# EAGLE board LSU 4.9 OpenAFR Gauge 48mm (EAGLE 9.6.2)
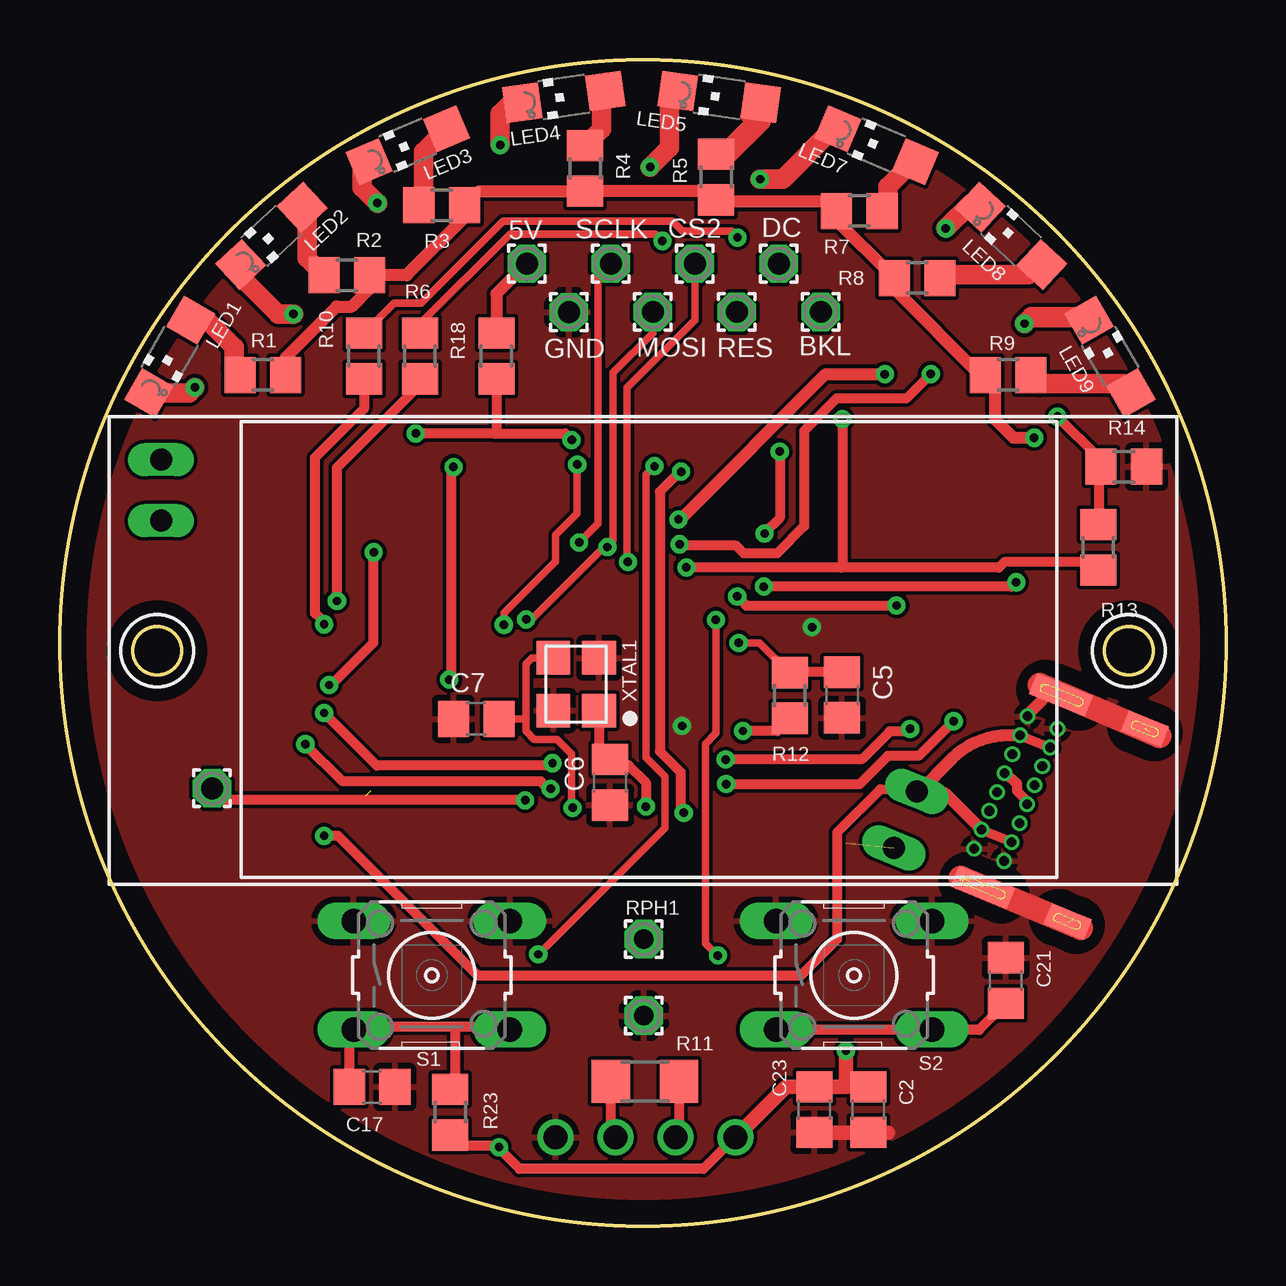
[diagram p0: board, top side]
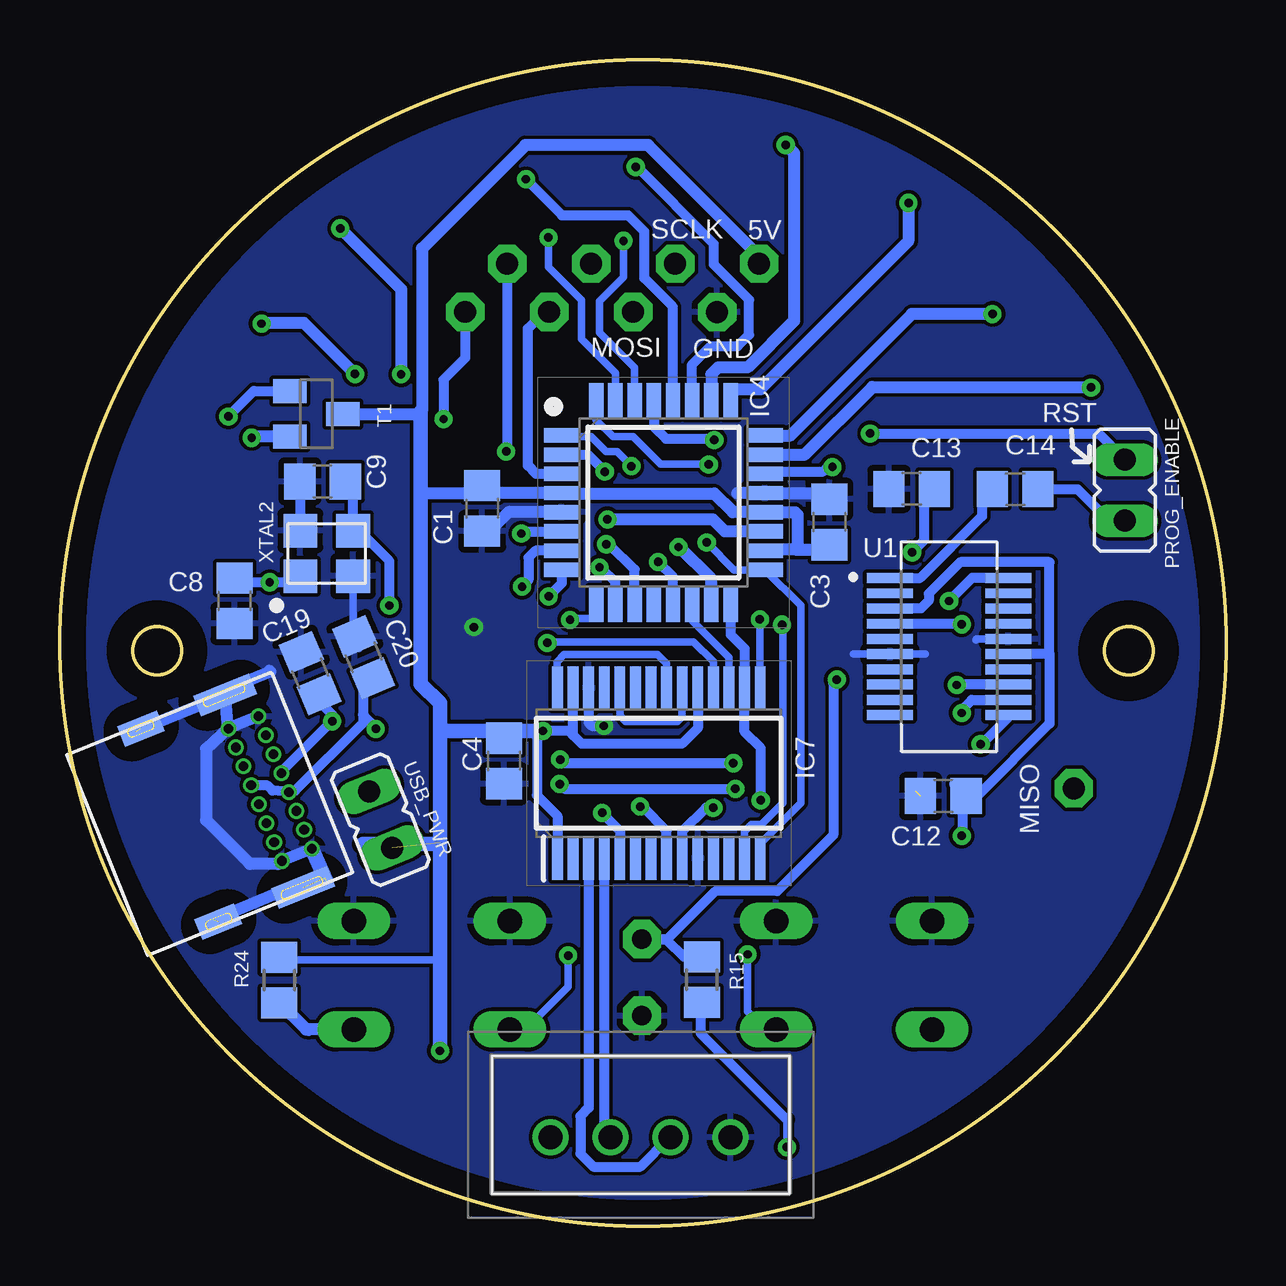
[diagram p1: board, bottom side, seen from below]

Size 48.6 x 48.6 mm. Coordinates in mm from the lower left corner, seen from the top.
Outline: circle at 4.05,23.98 radius 1
Outline: circle at 44.55,23.98 radius 1
Outline: circle at 24.3,24.3 radius 24.3
Copper layers (1*16): Top 0.035mm / dielectric 1.5mm / Bottom 0.035mm
Design rules "default *": minimum track width 6mil, minimum drill 0.35mm, track to track 6mil, track to pad 6mil, pad to pad 6mil, via to via 6mil, smd to smd 6mil, copper to edge 40mil, drill to drill 6mil, minimum pad ring 3mil, minimum via ring 8mil, stop-mask expansion 4mil, vias tented up to drill 0mil, thermal gap 10mil

## Footprints (pad centres in the part's own frame; a part is rotated, then mirrored left to right if it is on the bottom)
1,6/0,9 = drill 0.914 pad 1.6 octagon: 1 0,0
C0805 = smd 1.3 x 1.5: 1 -0.95,0; 2 0.95,0
QFP80P900X900X120-32N = smd 1.475 x 0.6: 1 -4.238,2.8; 2 -4.238,2; 3 -4.238,1.2; 4 -4.238,0.4; 5 -4.238,-0.4; 6 -4.238,-1.2; 7 -4.238,-2; 8 -4.238,-2.8; 17 4.238,-2.8; 18 4.238,-2; 19 4.238,-1.2; 20 4.238,-0.4; 21 4.238,0.4; 22 4.238,1.2; 23 4.238,2; 24 4.238,2.8 | smd 0.6 x 1.475: 9 -2.8,-4.238; 10 -2,-4.238; 11 -1.2,-4.238; 12 -0.4,-4.238; 13 0.4,-4.238; 14 1.2,-4.238; 15 2,-4.238; 16 2.8,-4.238; 25 2.8,4.238; 26 2,4.238; 27 1.2,4.238; 28 0.4,4.238; 29 -0.4,4.238; 30 -1.2,4.238; 31 -2,4.238; 32 -2.8,4.238
SOP65P780X200-28N = smd 1.8 x 0.45: 1 -3.55,4.225; 2 -3.55,3.575; 3 -3.55,2.925; 4 -3.55,2.275; 5 -3.55,1.625; 6 -3.55,0.975; 7 -3.55,0.325; 8 -3.55,-0.325; 9 -3.55,-0.975; 10 -3.55,-1.625; 11 -3.55,-2.275; 12 -3.55,-2.925; 13 -3.55,-3.575; 14 -3.55,-4.225; 15 3.55,-4.225; 16 3.55,-3.575; 17 3.55,-2.925; 18 3.55,-2.275; 19 3.55,-1.625; 20 3.55,-0.975; 21 3.55,-0.325; 22 3.55,0.325; 23 3.55,0.975; 24 3.55,1.625; 25 3.55,2.275; 26 3.55,2.925; 27 3.55,3.575; 28 3.55,4.225
B4BXHALFSN = drill 1 pad 1.5: 1 0,0; 2 2.5,0; 3 5,0; 4 7.5,0
CHIPLED_1206 = smd 1.5 x 1.5: A 0,-1.75; C 0,1.75
1,6/0,8 = drill 0.813 pad 1.6 octagon: 1 0,0
JP1 = drill 0.914 long: 1 0,-1.27; 2 0,1.27
R0805 = smd 1.3 x 1.5: 1 -0.95,0; 2 0.95,0
R1206 = smd 1.6 x 1.803: 1 -1.422,0; 2 1.422,0
B3F-10XX = drill 1.016 long: 1 -3.251,2.261; 2 3.251,2.261; 3 -3.251,-2.261; 4 3.251,-2.261
SOT23-BEC = smd 1 x 1.4: B -0.95,-1.1; C 0,1.1; E 0.95,-1.1
SOP63P599X175-20N = smd 1.97 x 0.41: 1 -2.47,2.857; 2 -2.47,2.223; 3 -2.47,1.587; 4 -2.47,0.953; 5 -2.47,0.318; 6 -2.47,-0.318; 7 -2.47,-0.953; 8 -2.47,-1.587; 9 -2.47,-2.223; 10 -2.47,-2.857; 11 2.47,-2.857; 12 2.47,-2.223; 13 2.47,-1.587; 14 2.47,-0.953; 15 2.47,-0.318; 16 2.47,0.318; 17 2.47,0.953; 18 2.47,1.587; 19 2.47,2.223; 20 2.47,2.857
USBC-2.0-THT = drill 0.4 pad 0.65: P$1 -3,3.7; P$2 -2.15,3.7; P$3 -1.3,3.7; P$4 -0.45,3.7; P$5 0.4,3.7; P$6 1.25,3.7; P$7 2.1,3.7; P$8 2.95,3.7; P$9 2.95,2.35; P$10 2.1,2.35; P$11 1.25,2.35; P$12 0.4,2.35; P$13 -0.45,2.35; P$14 -1.3,2.35; P$15 -2.15,2.35; P$16 -3,2.35 | smd 0.914 x 1.778 bottom: P$17 -4.36,-1.03; P$18 4.31,-1.06 | smd 0.914 x 2.5: P$19 -4.35,2.75; P$22 4.3,2.76 | smd 0.914 x 2.5 bottom: P$20 4.3,2.76; P$21 -4.35,2.75 | smd 0.914 x 1.778: P$23 4.31,-1.06; P$24 -4.36,-1.03
E3X160181X04 = smd 1.4 x 1.4: GND1 -1.1,0.9; GND2 1.1,-1; XTAL1 -1.1,-1; XTAL2 1.1,0.9

## Placement (x,y rotation side)
5V  [1,6/0,9]  19.46,40.11 0 top
BKL  [1,6/0,9]  31.71,38.1 0 top
C1  100nF  [C0805]  31,29.91 270 bottom
C2  10uF  [C0805]  33.69,4.85 270 top
C3  100nF  [C0805]  16.53,29.34 90 bottom
C4  100nF  [C0805]  30.09,19.38 90 bottom
C5  100nF  [C0805]  32.6,22.13 270 top
C6  100nF  [C0805]  22.93,18.49 270 top
C7  100nF  [C0805]  17.35,21.14 180 top
C8  100nF  [C0805]  41.32,26.06 270 bottom
C9  100nF  [C0805]  37.65,31.03 180 bottom
C12  100nF  [C0805]  11.78,17.92 180 bottom
C13  100nF  [C0805]  13.1,30.72 180 bottom
C14  100nF  [C0805]  8.79,30.71 0 bottom
C17  100nF  [C0805]  13.01,5.79 180 top
C19  47pF  [C0805]  38.17,23.04 293 bottom
C20  47pF  [C0805]  35.94,23.7 293 bottom
C21  100nF  [C0805]  39.42,10.23 270 top
C23  10uF  [C0805]  31.44,4.85 270 top
CS2  [1,6/0,9]  26.46,40.11 0 top
DC  [1,6/0,9]  29.96,40.11 0 top
GND  [1,6/0,9]  21.21,38.09 0 top
IC4  ATMEGA328PB-AN  [QFP80P900X900X120-32N]  23.45,30.15 0 bottom
IC7  MCP25625-E_SS  [SOP65P780X200-28N]  23.64,18.87 90 bottom
J1  B4B-XH-A_LF__SN_  [B4BXHALFSN]  28.15,3.69 0 bottom
LED1  [CHIPLED_1206]  4.57,36.24 150 top
LED2  [CHIPLED_1206]  8.81,41.27 133 top
LED3  [CHIPLED_1206]  14.5,45.05 113 top
LED4  [CHIPLED_1206]  21,47.06 98 top
LED5  [CHIPLED_1206]  27.48,47.06 82 top
LED7  [CHIPLED_1206]  34.04,45.05 67 top
LED8  [CHIPLED_1206]  39.65,41.27 47 top
LED9  [CHIPLED_1206]  43.77,36.24 30 top
MISO  [1,6/0,9]  6.34,18.24 0 top
MOSI  [1,6/0,9]  24.71,38.1 0 top
PAD2  [1,6/0,8]  24.34,8.76 0 top
PROG_ENABLE  [JP1]  4.21,30.67 0 bottom
R1  1k  [R0805]  8.46,35.47 0 top
R2  1k  [R0805]  11.96,39.63 0 top
R3  1k  [R0805]  15.91,42.54 0 top
R4  1k  [R0805]  21.89,44.08 270 top
R5  1k  [R0805]  27.35,43.72 270 top
R6  150  [R0805]  15,36.26 270 top
R7  1k  [R0805]  33.32,42.3 180 top
R8  1k  [R0805]  35.73,39.51 180 top
R9  1k  [R0805]  39.52,35.47 180 top
R10  150R  [R0805]  12.67,36.26 270 top
R11  120R  [R1206]  24.38,6.03 180 top
R12  10k  [R0805]  30.42,22.11 270 top
R13  300R  [R0805]  43.28,28.29 270 top
R14  100k  [R0805]  44.34,31.65 180 top
R15  10k  [R0805]  21.85,10.27 90 bottom
R18  10k  [R0805]  18.19,36.26 270 top
R23  10k  [R0805]  16.27,4.74 90 top
R24  10k  [R0805]  39.46,10.25 270 bottom
RES  [1,6/0,9]  28.21,38.1 0 top
RPH1  [1,6/0,8]  24.34,11.95 0 top
S1  [B3F-10XX]  15.5,10.45 0 top
S2  [B3F-10XX]  33.1,10.45 0 top
SCLK  [1,6/0,9]  22.96,40.11 0 top
T1  [SOT23-BEC]  37.91,33.85 270 bottom
U1  FT231XS-R  [SOP63P599X175-20N]  11.54,24.15 0 bottom
U$1  USBC-2.0-THT  [USBC-2.0-THT]  42.64,17.07 292 bottom
U$2  E3X160181X04  [E3X160181X04]  21.47,22.58 90 top
U$3  E3X160181X04  [E3X160181X04]  37.48,28.08 0 bottom
USB_PWR  [JP1]  35.24,16.93 22 bottom

## Library data of the parts
5V BKL CS2 DC GND MISO MOSI PAD2 RES RPH1 SCLK = wirepad
C1-C9 C12-C14 C17 C19-C21 C23 = rcl; SPICEPREFIX: C
IC4 = ATMEGA328PB-AN; DESCRIPTION: MCU 8-bit ATmega AVR RISC 32KB Flash 2.5V/3.3V/5V 32-Pin TQFP Tray; HEIGHT: 1.2mm; MANUFACTURER_NAME: Microchip; MANUFACTURER_PART_NUMBER: ATMEGA328PB-AN; MOUSER_PART_NUMBER: 556-ATMEGA328PB-AN; MOUSER_PRICE-STOCK: https://www.mouser.co.uk/ProductDetail/Microchip-Technology/ATMEGA328PB-AN?qs=jy4bLUHv09gDoS2J01KCIw%3D%3D
IC7 = MCP25625-E_SS; DESCRIPTION: CAN Controller with Transceiver SSOP28 Microchip MCP25625-E/SS, CAN Controller 1MBps CAN 2.0, 28-Pin SSOP; HEIGHT: 2mm; MANUFACTURER_NAME: Microchip; MANUFACTURER_PART_NUMBER: MCP25625-E/SS; MOUSER_PART_NUMBER: 579-MCP25625-E/SS; MOUSER_PRICE-STOCK: https://www.mouser.co.uk/ProductDetail/Microchip-Technology/MCP25625-E-SS?qs=YlpJWyuQ3PO6FRVW%2Ffac7A%3D%3D
J1 = B4B-XH-A_LF__SN_; DESCRIPTION: CONN HEADER VERT 4POS 2.5MM; HEIGHT: 7mm; MANUFACTURER_NAME: JST (JAPAN SOLDERLESS TERMINALS); MANUFACTURER_PART_NUMBER: B4B-XH-A(LF)(SN); MOUSER_PART_NUMBER: 306-B4BXHALFSN; MOUSER_PRICE-STOCK: https://www.mouser.co.uk/ProductDetail/JST-Commercial/B4B-XH-ALFSN?qs=cdbOS8ANM9CfC08d%252BywhFw%3D%3D
LED1-LED5 LED7-LED9 = led
PROG_ENABLE USB_PWR = jumper
R1-R15 R18 R23 R24 = rcl; SPICEPREFIX: R
S1 S2 = switch-omron; MPN: B3F-1000; OC_FARNELL: 176432; OC_NEWARK: 36M3542
T1 = transistor
U1 = FT231XS-R; CHECK_PRICES: https://www.snapeda.com/parts/FT231XSR/FTDI/view-part/?ref=eda; DESCRIPTION: I/F,USB2.0 FS TO F/L H/S UART,20SSOP; USB IC Type:USB-UART Converter; USB Standard:USB 2.0; Supply Voltage Min:2.97V; Supply Voltage Max:5.5V; Interface Case Style:SSOP; No. of Pins:20Pins; Data Rate:3Mbaud; No. of Ports:4 Port; Operating Temperature Min:-40°C; Operating Temperature Max:85°C; Product Range:FT231X; MSL:MSL 3 - 168 hours; SVHC:No SVHC (15-Jan-2019); Operating Temperature Range:-40°C to +85°C; Supply Voltage Range:2.97V to 5.5V; USB Type:Transceiver; DIGIKEY_PART_NUMBER: 768-1129-1-ND; MF: FTDI Chip; MP: FT231XSR; PACKAGE: None; SNAPEDA_LINK: https://www.snapeda.com/parts/FT231XSR/FTDI/view-part/?ref=snap
U$1 = USBC-2.0-THT
U$2 U$3 = E3X160181X04

## Nets
+5V: 5V.1 C1.1 C3.1 C4.2 C23.1 IC4.4 IC4.18 IC4.20 IC7.1 IC7.19 IC7.27 J1.1 R12.2 R15.1 R18.1 R23.1 R24.1 T1.C USB_PWR.1
BCKLT: BKL.1 IC4.10 R13.2
BINT1: C17.2 IC4.1 R23.2 S1.3 S1.4
BINT2: C21.2 IC4.9 R24.2 S2.3 S2.4
CAN_H: IC7.4 J1.2 R11.1
CAN_INT: IC4.32 IC7.13
CAN_L: IC7.3 J1.3 R11.2
CAN_STBY: IC4.2 IC7.5
D+: C19.2 U1.11 U$1.P$4 U$1.P$12
D-: C20.2 U1.12 U$1.P$5 U$1.P$13
DC: DC.1 IC4.6
GND: C1.2 C3.2 C4.1 C5.2 C6.2 C7.2 C8.2 C9.2 C12.2 C13.2 C17.1 C19.1 C20.1 C21.1 C23.2 GND.1 IC4.5 IC4.21 IC7.10 IC7.26 J1.4 PAD2.1 R14.1 S1.1 S1.2 S2.1 S2.2 U1.6 U1.16 U$1.P$1 U$1.P$8 U$1.P$9 U$1.P$16 U$1.P$17 U$1.P$18 U$1.P$19 U$1.P$20 U$2.GND1 U$2.GND2 U$3.GND1 U$3.GND2
GRN1: IC4.23 LED1.C
GRN2: IC4.24 LED2.C
GRN3: IC4.25 LED3.C
IN_RX: R10.2 U1.4
IN_TX: R6.2 U1.20
N$1: LED1.A R1.1
N$2: IC4.30 R6.1
N$3: LED2.A R2.1
N$4: LED3.A R3.1
N$5: LED4.A R4.1
N$6: LED5.A R5.1
N$7: IC4.31 R10.1
N$8: LED7.A R7.1
N$9: LED8.A R8.1
N$10: LED9.A R9.1
N$11: C7.1 IC7.9 U$2.XTAL2
N$12: C6.1 IC7.8 U$2.XTAL1
N$13: C5.1 IC7.18 R12.1
N$14: C9.1 IC4.8 U$3.XTAL2
N$15: R1.2 R2.2 R3.2 R4.2 R5.2 R7.2 R8.2 R9.2 T1.E
N$16: R13.1 R14.2 T1.B
N$19: C14.2 PROG_ENABLE.1
N$21: C13.1 U1.13
N$22: C14.1 U1.1
N$25: C8.1 IC4.7 U$3.XTAL1
PHOTOSENS: IC4.22 R15.2 RPH1.1
RED1: IC4.28 LED7.C
RED2: IC4.19 LED8.C
RED3: IC4.11 LED9.C
RES: IC4.3 RES.1
RESET: IC4.29 PROG_ENABLE.2 R18.2
RXCAN: IC7.21 IC7.28
SPI_CLK: IC4.17 IC7.14 SCLK.1
SPI_CS1: IC4.14 IC7.17
SPI_CS2: CS2.1 IC4.13
SPI_MISO: IC4.16 IC7.16 MISO.1
SPI_MOSI: IC4.15 IC7.15 MOSI.1
SYS_CLK: IC4.12
TXCAN: IC7.20 IC7.24
VBUS: C12.1 U1.3 U1.15 U$1.P$2 U$1.P$7 U$1.P$10 U$1.P$15 USB_PWR.2
YEL1: IC4.26 LED4.C
YEL2: IC4.27 LED5.C

## Tracks (layer width: path | path; a pad name or v marks a point on that pad's centre or on a via)
+5V  (via drill 0.35)  (1 unrouted)
  Top 0.406: 18.56,37.64 R18.1 17.65,37.21 | R23.1 16.73,3.33 18.25,3.33 v18.3,3.28 18.3,3.23 19.15,2.38 26.82,2.38 30.29,5.85 31.39,5.85 C23.1 | R12.2 29.89,20.63 v28.47,20.63
  Top 0.508: 5V.1 19.42,40.09 18.19,38.86 R18.1 18.24,37.16 18.24,37.04 | 31.72,5.8 C23.1
  Top 0.61: J1.1 30.26,5.8 31.72,5.8 | v32.76,7.3 32.76,5.95 32.81,5.9 32.81,5.8 C23.1
  Bottom 0.305: 30.69,30.55 C1.1 | 19.18,28.18 IC4.18 | R15.1 | IC7.27 27.21,21.84 | 27.18,21.88 27.21,21.84 | 27.21,21.84 27.25,21.8 | T1.C 36.79,33.84 | 18.3,4.43 v18.3,3.28 | R24.1 39.34,11.08 32.76,11.08
  Bottom 0.406: v18.3,3.28 18.33,3.28 | IC7.19 22.02,20.75 22.68,20.09 26.85,20.09 27.21,20.46 | 27.21,20.46 IC7.27 | 27.21,20.46 27.39,20.63 v28.47,20.63 | IC4.20 19.19,29.73 | 27.67,30.53 IC4.4 | v28.47,20.63 28.72,20.38 28.72,17.95 27.86,17.09 IC7.1 | v28.47,20.63 29.79,20.63 C4.2 | 33.63,33.85 33.56,33.92 33.51,33.97 | C1.1 31.32,30.54 | 33.34,30.54 33.56,30.32 | R15.1 21.9,9.27 21.9,8.03 18.3,4.43
  Bottom 0.508: IC4.4 30.69,30.55 | C1.1 31.02,30.84 | 5V.1 19.46,40.43 24.08,45.05 29.2,45.05 33.51,40.74 33.51,33.97 | IC4.20 20.56,29.75 21.33,30.53 27.67,30.53 | T1.C 33.63,33.85 | 33.34,30.54 31.32,30.54 | IC4.20 17.96,29.75 17.86,29.65 17.86,28.23 17.91,28.18 | 17.91,28.18 16.73,28.18 C3.1 | 17.91,28.18 19.18,28.18
  Bottom 0.61: v32.77,7.29 v32.76,7.3 32.76,11.08 32.76,15.97 | 32.77,20.63 32.77,21.8 33.56,22.59 33.56,30.32 33.56,33.92 | 32.77,20.63 32.77,15.92 35.97,15.92 USB_PWR.1 | v28.47,20.63 32.77,20.63
BCKLT  (via drill 0.35)
  Top 0.305: R13.2 42.95,27.67 | 32.61,27.48 32.57,27.44
  Top 0.406: v26.11,27.45 v26.12,27.44 32.57,27.44 39.13,27.44 39.36,27.67 42.95,27.67 | v32.61,33.63 32.61,27.48
  Bottom 0.305: BKL.1 31.59,37.98 | v32.62,33.64 v32.61,33.63
  Bottom 0.406: IC4.10 25.45,26.84 26.06,27.45 v26.11,27.45 | BKL.1 31.71,36.18 32.62,35.27 v32.62,33.64
BINT1  (via drill 0.35)
  Top 0.305: v19.94,11.32 v19.95,11.32 25.22,16.59 25.22,18.73 24.42,19.53 24.42,31.32 v24.77,31.67 v24.78,31.67
  Top 0.406: 16.48,8.29 12.35,8.29 S1.3 12.06,7.98 C17.2 | S1.4 18.65,8.29 16.48,8.29 | R23.2 16.48,5.9 16.48,8.29 | 16.48,8.29
  Bottom 0.305: IC4.1 27.64,32.9 26.46,32.9 25.83,32.27 25.38,32.27 v24.78,31.67 | v19.94,11.32 19.95,11.31 19.95,8.94 19.2,8.19 S1.4
BINT2  (via drill 0.35)
  Top 0.305: v27.42,11.27 27.37,11.32 27.36,11.32 26.9,11.78 26.9,20.1 27.34,20.54 v27.34,25.26
  Top 0.406: C21.2 38.31,8.17 36.38,8.17 S2.4 S2.3
  Bottom 0.305: IC4.9 26.25,25.56 26.5,25.31 27.29,25.31 v27.34,25.26 | S2.3 29.2,8.19 27.42,9.97 v27.42,11.27 | R24.2 38.23,8.07
  Bottom 0.406: S2.3 29.85,8.13
  Bottom 0.508: S2.4 38.35,8.19 R24.2
CAN_H
  Top 0.406: R11.1 25.8,3.84 J1.2
  Bottom 0.406: IC7.4 25.91,3.91 J1.2
CAN_INT  (via drill 0.35)
  Top 0.305: v18.5,25.06 18.5,25.54 20.66,27.7 20.66,28.79 21.56,29.69 v21.56,31.74
  Bottom 0.305: v18.5,25.06 18.46,25.02 18.46,17.63 19.36,16.73 19.77,16.73 20.07,16.43 IC7.13 | v21.56,31.74 v21.57,31.75 23.57,31.75 24.71,32.89 25.55,32.89 26.25,33.6 IC4.32
CAN_L
  Top 0.406: R11.2 22.96,3.9 J1.3
  Bottom 0.406: IC7.3 26.57,4.92 26.91,4.57 26.91,3.01 26.37,2.47 24.41,2.47 23.19,3.69 J1.3
CAN_STBY  (via drill 0.35)
  Top 0.406: v25.89,31.44 25.84,31.44 25.01,30.61 25.01,19.78 25.87,18.92 25.87,17.35 v26,17.22
  Bottom 0.305: 25.25,15.34 IC7.5
  Bottom 0.406: IC4.2 26.6,32.15 v25.89,31.44 | v26,17.22 25.25,16.47 25.25,15.34
D+  (via drill 0.35)
  Top 0.406: U$1.P$4 39.89,18.45 39.89,18.13 40.32,17.69 U$1.P$12 | v20.45,18.22 20.35,18.22 20.04,18.53 11.77,18.53 v10.23,20.08 | v27.77,18.42 33.34,18.42 34.51,19.59 35.8,19.59 v37.25,21.04
  Bottom 0.406: C19.2 37.8,21.85 37.22,21.27 37.22,21.07 v37.25,21.04 39.35,18.94 arc-45 U$1.P$4 | v27.77,18.42 27.57,18.22 v20.45,18.22 | U1.11 9.07,21.2 10.2,20.08 v10.23,20.08
D-  (via drill 0.35)
  Top 0.406: v27.75,19.44 v27.76,19.45 33.42,19.45 34.59,20.62 35.34,20.62 v35.44,20.72 | v20.53,19.29 20.43,19.19 13.2,19.19 v11.01,21.38
  Bottom 0.406: U$1.P$13 40.61,18.36 39.95,18.36 39.74,18.15 U$1.P$5 38.79,18.15 35.97,20.97 35.97,21.3 | 35.97,21.3 35.97,22.43 C20.2 | 35.97,21.3 35.44,20.77 v35.44,20.72 | v27.75,19.44 27.6,19.29 v20.53,19.29 | U1.12 10.59,21.93 11.01,21.51 v11.01,21.38
DC  (via drill 0.35)
  Top 0.305: 29.37,28.88 v29.37,28.86
  Top 0.406: v30,32.28 30,29.51 29.37,28.88
  Bottom 0.305: v29.37,28.86 29.28,28.95 | v30,32.28 29.96,32.32
  Bottom 0.406: 29.28,28.95 IC4.6 | DC.1 29.96,32.32
GND  (via drill 0.35)  (7 unrouted)
  Top 0.305: 41.29,22.36 41.29,22.68
  Top 0.406: 14.06,5.69 C17.1 | 40.95,22.67 40.95,22.68 41.29,22.68 | 40.95,22.56 40.95,21.93 | U$1.P$1 40.41,21.39 | 31.33,4.01 C23.2 31.55,4.01
  Top 0.508: 17.56,12.64 18.64,12.64 | GND.1 | 40.95,21.93 40.41,21.39
  Top 0.61: S2.2 36.39,12.67 | 32.27,3.88 34.52,3.88
  Top 1.016: 37.56,14.5 42.55,12.43 | 40.85,22.55 45.82,20.42
  Bottom 0.305: 14.3,30.48 C13.2 | C12.2 12.73,17.85 | U$3.GND2 36.38,26.95 | 36.38,26.95 36.38,24.31 36.13,24.06 36.13,24.39 C20.1 | U$3.GND1 38.47,28.98 | 36.44,26.95 36.38,26.95 | 15.53,23.85 15.51,23.83 U1.6 12.54,23.83 12.52,23.85 | U1.16 10.39,24.47 10.43,24.43 | 30.92,29.2 31,29.12
  Bottom 0.406: 39.9,23.18 39.83,23.11 | IC4.21 19.37,30.55 19.31,30.61 | 31,29.12 C1.2 | C9.2 38.6,29.11 38.47,28.98 | 39.83,23.16 39.81,23.14 | IC7.26 26.57,20.96 26.44,20.84 v25.93,20.84
  Bottom 0.508: U$1.P$1 U$1.P$16 | U$1.P$16 U$1.P$19 44.85,20.87 45.43,20.62 | C20.1 36.65,24.57 | 40.97,22.66 39.83,23.11 | C19.1 38.72,23.74 | 42.2,12.75 38.31,14.37 37.6,14.67 U$1.P$8 U$1.P$9 39.51,15.08 40.67,15.08 42.51,16.92 42.51,19.89 U$1.P$16 | 19.22,30.56 IC4.21 | IC4.5 27.71,29.77 | 27.65,29.71 IC4.5 | IC4.21 | IC4.21 | IC4.21 16.79,30.55 C3.2 | IC4.5 29.91,29.75 30.61,29.05 | IC4.21 20.36,30.55 20.38,30.53
  Bottom 0.61: U$1.P$8 38.08,15.7 37.5,14.39 | 36.35,12.8 S2.2 | 12.95,18.12 12.84,18.23
  other vias: 31.35,24.96
  pour Top: 14.45,49.57 -0.02,35.1 -0.02,13.6 13.9,-0.07 34.94,-0.07 49.8,14.3 49.8,33.98 34.21,49.57
  pour Bottom: 14.46,49.57 -0.01,35.1 -0.01,13.6 13.66,-0.07 35.05,0.03 49.82,14.61 49.82,33.97 34.22,49.57
GRN1  (via drill 0.35)
  Top 0.813: v5.62,34.95 5.39,34.72 LED1.C
  Bottom 0.508: IC4.23 17.57,32.15 14.74,34.97 5.64,34.97 v5.62,34.95
GRN2  (via drill 0.35)
  Top 0.813: v9.73,38.01 9.1,38.01 7.53,39.58 LED2.C
  Bottom 0.508: IC4.24 18.15,32.95 13.09,38.01 v9.73,38.01
GRN3  (via drill 0.35)
  Top 0.813: LED3.C 12.6,44.48 12.6,43.27 v13.23,42.64
  Bottom 0.305: IC4.25 20.65,34.88
  Bottom 0.508: v13.23,42.64 v13.24,42.63 13.24,41.04 19.4,34.88 20.65,34.88
IN_RX  (via drill 0.35)
  Top 0.406: R10.2 12.67,34.07 10.63,32.03 10.63,25.55 11.01,25.16 v11.01,25.08
  Bottom 0.406: U1.4 11.03,25.1 v11.01,25.08
IN_TX  (via drill 0.35)
  Top 0.305: R6.2 14.93,35.31
  Top 0.406: R6.2 15.04,35.27 15.04,35.09 11.54,31.59 v11.54,26.05
  Bottom 0.406: v11.54,26.05 10.58,27.01 U1.20
N$1
  Top 0.813: R1.1 7.26,35.72 7.26,36.64 6.14,37.76 LED1.A
N$2  (via drill 0.35)
  Top 0.305: R6.1 14.99,37.58 18.76,41.35 24.82,41.35 v25.11,41.06
  Bottom 0.305: IC4.30 24.65,35.77 26.12,37.24 26.12,38.54 25.12,39.54 v25.12,41.05 v25.11,41.06
N$3
  Top 0.813: LED2.A 10.3,42.46 10.3,40.34 R2.1
N$4
  Top 0.813: LED3.A 15.15,44.77 15.15,42.73 R3.1
N$5
  Top 0.305: 22.58,45.72 22.58,45.82 | 22.75,47.29 22.75,47.92
  Top 0.6: LED4.A 22.38,46.95
  Top 0.813: LED4.A 22.58,47.15 22.58,47.12 | 22.58,47.12 22.58,45.82 | 22.75,47.29 22.58,47.12 | 22.58,45.72 R4.1
N$6
  Top 0.305: R5.1 29.28,46.6 29.28,47.37
  Top 0.6: 28.66,46.28 LED5.A
  Top 0.813: LED5.A 29.21,46.03 27.85,44.67 R5.1
N$7  (via drill 0.35)
  Top 0.305: R10.1 13.93,38.47 15.05,38.47 18.47,41.89 25.53,41.89 25.95,41.47 28.01,41.47 28.24,41.24 v28.24,41.2
  Bottom 0.305: IC4.31 25.45,35.55 26.87,36.97 26.87,38.6 28.24,39.97 v28.24,41.2 28.36,41.08
N$8
  Top 0.813: LED7.A 35.56,44.37 34.52,43.33 34.52,42.55 R7.1
N$9
  Top 0.813: LED8.A 40.36,39.65 36.82,39.65 R8.1
N$10
  Top 0.305: 40.49,35.47 R9.1 40.83,35.11 44.39,35.11 LED9.A
  Top 0.813: LED9.A 44.32,35.11 40.85,35.11 40.49,35.47
N$11  (via drill 0.35)
  Top 0.305: C7.1 19.42,21.14 | 19.42,21.14 19.42,20.63 19.77,20.28 20.72,20.28 21.32,19.68 21.32,17.48 v21.37,17.43 | U$2.XTAL2 19.67,23.68 19.42,23.43 19.42,21.14
  Top 0.508: 20.34,23.68 U$2.XTAL2
  Bottom 0.406: IC7.9 22.66,16.45 21.68,17.43 v21.37,17.43
N$12  (via drill 0.35)
  Top 0.406: U$2.XTAL1 22.47,19.9 22.82,19.55 | 22.82,19.55 22.82,19.2 23.7,19.2 24.42,18.48 v24.42,17.48 | 22.82,19.55 C6.1
  Bottom 0.406: 23.3,15.31 IC7.8 23.32,16.48 24.32,17.48 v24.42,17.48
N$13  (via drill 0.35)
  Top 0.305: R12.1 30.4,23.06 29.16,24.3 v28.29,24.3
  Top 0.406: C5.1 30.42,23.08 R12.1
  Bottom 0.305: IC7.18 21.36,23.53 22.19,24.35 28.24,24.35 v28.29,24.3
N$14  (via drill 0.35)
  Top 0.406: v28.23,26.24 28.61,25.86 v34.87,25.86
  Bottom 0.305: 36.14,28.98 U$3.XTAL2
  Bottom 0.406: IC4.8 27.69,26.78 v28.23,26.24 | v34.87,25.86 34.87,27.71 36.14,28.98 | U$3.XTAL2 36.38,30.71 C9.1
N$15  (via drill 0.35)
  Top 0.305: R1.2 9.41,36.2 | 12.91,39.06 R2.2
  Top 0.406: R3.2 16.88,42.52 16.88,42.05 | 9.41,36 R1.2 | 26.99,43.13 R5.2 27.42,42.7 | R7.2 31.98,42.3 | R8.2 34.78,39.06
  Top 0.508: 16.88,42.05 14.45,39.63 R2.2 | R3.2 17.45,43.13 R4.2 26.99,43.13 | R7.2 31.97,42.7 27.42,42.7 | R8.2 35.03,39.26 35.03,39.25 31.98,42.3 | 34.78,39.06 38.37,35.47 R9.2 38.97,35.07 38.97,33.64 39.76,32.85 v40.61,32.85 | 9.41,36.2 11.53,38.32 12.17,38.32 12.91,39.06
  Bottom 0.406: v40.61,32.85 40.56,32.9
  Bottom 0.508: T1.E 40.56,32.9
N$16  (via drill 0.35)
  Top 0.305: 43.3,29.26 R13.1 43.29,31.55 R14.2
  Top 0.406: v41.58,33.74 43.3,32.02 43.3,29.26
  Bottom 0.406: T1.B 40.52,34.8 v41.58,33.74
N$19
  Bottom 0.305: 4.59,29.12 4.31,29.4 PROG_ENABLE.1
  Bottom 0.406: C14.2 6.19,30.71 4.59,29.12
N$21  (via drill 0.35)
  Top 0.406: v11.22,22.55 11.31,22.55 13.06,24.3 13.06,28.06 v13.08,28.08
  Bottom 0.406: U1.13 11.22,22.56 v11.22,22.55 | C13.1 12.6,30.27 12.6,28.56 v13.08,28.08
N$22
  Bottom 0.305: C14.1 9.27,30.24
  Bottom 0.406: U1.1 12.74,27.01 10.17,29.58 10.17,30.28 C14.1
N$25  (via drill 0.35)
  Top 0.305: v29.34,26.65 v29.34,26.64
  Top 0.406: v29.34,26.64 39.67,26.64 v39.86,26.83
  Bottom 0.406: v29.34,26.65 29.07,26.92 29.07,27.86 28.78,28.15 IC4.7 | U$3.XTAL1 38.83,26.83 v39.86,26.83 41.14,26.83 C8.1
PHOTOSENS  (via drill 0.35)
  Top 0.406: v16.22,22.77 16.3,22.86 16.3,31.54 v16.4,31.64
  Bottom 0.305: R15.2 22.6,11.22
  Bottom 0.406: v16.22,22.77 16.37,22.62 16.37,16.29 18.7,13.96 21.28,13.96 23.29,11.95 RPH1.1 23.33,11.95 22.6,11.22 | IC4.22 19.21,31.4 19.16,31.45 16.79,31.45 16.6,31.64 v16.4,31.64
RED1  (via drill 0.35)
  Top 0.813: v29.18,43.63 30.12,43.63 32.23,45.73 LED7.C
  Bottom 0.406: v29.18,43.63 27.68,42.13 24.92,42.13 24.24,41.45 24.24,39.5 23.05,38.31 IC4.28
RED2  (via drill 0.35)
  Top 0.508: v25.78,29.45 25.86,29.45 31.91,35.5 v34.38,35.5
  Top 0.813: LED8.C 38.35,42.62 37.96,42.62 v36.92,41.58
  Bottom 0.508: v36.92,41.58 34.38,39.04 v34.38,35.5 | IC4.19 20.89,28.95 21.39,29.45 v25.78,29.45
RED3  (via drill 0.35)
  Top 0.305: v25.83,28.41 25.88,28.36 | v40.2,37.61 42.22,37.61 42.69,38.08 43.38,38.08
  Top 0.406: 25.88,28.36 28.18,28.36 28.5,28.05 29.9,28.05 31.02,29.16 31.02,33.14 32.37,34.49 35.28,34.49 v36.3,35.51
  Top 0.813: LED9.C 42.8,37.9 40.49,37.9 v40.2,37.61
  Bottom 0.406: IC4.11 24.65,27.36 24.66,27.35 25.72,28.41 v25.83,28.41
  Bottom 0.508: v40.2,37.61 40.2,37.64 38.44,37.64 v36.3,35.51
RES
  Bottom 0.406: RES.1 28.41,38.1 29.1,37.41 29.1,31.69 28.76,31.35 IC4.3
RESET  (via drill 0.35)
  Top 0.305: R18.2 18.32,35.37 | 18.19,33.15 18.07,33.03
  Top 0.406: v14.83,33.03 18.07,33.03 21.06,33.03 v21.33,32.76 | R18.2 18.19,33.15
  Bottom 0.305: IC4.29 23.84,34.37
  Bottom 0.406: 23.84,34.37 23.84,33.3 23.34,32.81 21.38,32.81 v21.33,32.76 | PROG_ENABLE.2 5.3,33.03 v14.83,33.03
RXCAN
  Bottom 0.305: IC7.21 | IC7.28 27.86,22.95 27.87,22.95 27.89,22.95 27.89,23.5 27.58,23.81 23.69,23.81 23.32,23.43 IC7.21
SPI_CLK  (via drill 0.35)
  Top 0.305: 21.72,28.57 v21.64,28.49 22.42,29.27 22.42,39.62 22.91,40.11 SCLK.1 22.88,40.03
  Bottom 0.305: IC7.14 19.41,15.94 17.72,17.63 17.72,25.86 IC4.17 20.5,27.35 v21.64,28.49
SPI_CS1
  Bottom 0.305: IC4.14 22.24,25.21 20.71,23.68 IC7.17
SPI_CS2  (via drill 0.35)
  Top 0.305: v23.67,27.68 23.64,27.71 23.64,34.94 26.46,37.76 CS2.1
  Bottom 0.406: IC4.13 23.05,27.06 v23.67,27.68
SPI_MISO  (via drill 0.35)
  Top 0.406: v19.39,17.74 19.37,17.76 6.82,17.76 MISO.1
  Bottom 0.406: IC4.16 20.65,24.65 20.07,24.07 IC7.16 20.07,20.59 19.39,19.92 v19.39,17.74
SPI_MOSI  (via drill 0.35)
  Top 0.305: v19.43,25.28 19.65,25.28 22.67,28.3 v22.82,28.3 22.82,28.33 23.06,28.57 23.06,35.57 24.71,37.22 MOSI.1
  Bottom 0.305: IC7.15 19.41,25.27 v19.43,25.28
  Bottom 0.508: IC4.15 21.47,25.93 21.47,27 22.77,28.3 v22.82,28.3
TXCAN
  Bottom 0.305: IC7.20 22.66,21.23 22.86,21.03 25.02,21.03 25.27,21.28 IC7.24
VBUS  (via drill 0.35)
  Top 0.406: U$1.P$10 U$1.P$7 38.34,16.58 | U$1.P$15 U$1.P$2 40.07,20.49 | v11.01,16.26 11.59,16.26 17.42,10.43 30.87,10.43 32.39,11.95 32.39,16.4 34.19,18.2 USB_PWR.2 35.81,18.12
  Top 0.508: USB_PWR.2 36.19,18.25 arc-45 37.04,17.89 U$1.P$7 | U$1.P$2 39.55,20.45 arc45 37.16,19.46 35.81,18.12
  Bottom 0.406: C12.1 11.32,18.41 | C12.1 10.98,17.77 10.98,16.26 v11.01,16.26 | U1.15 9.05,23.85 7.35,23.85 | 7.35,23.85 7.35,20.94 10.37,17.92 C12.1 | 7.35,23.85 7.35,27.67 11.08,27.67 12.39,26.36 12.39,26.06 12.71,25.74 U1.3
YEL1  (via drill 0.35)
  Top 0.6: 19.1,46.65 LED4.C
  Top 0.813: LED4.C 18.81,46.82 18.35,46.36 v18.35,45.06
  Bottom 0.508: IC4.26 21.45,35.5 21.17,35.78 19.95,35.78 18,37.73 18,44.71 v18.35,45.06
YEL2  (via drill 0.35)
  Top 0.305: v24.6,44.14 24.6,44.21
  Top 0.813: LED5.C 25.4,46.95 25.4,44.94 v24.6,44.14
  Bottom 0.305: 24.57,44.17 v24.6,44.14
  Bottom 0.406: IC4.27 22.27,34.41 22.27,35.88 21.48,36.67 20.36,36.67 19.88,37.15 19.88,38.61 21.34,40.07 21.34,40.93 24.57,44.17

## Text on the board
bPlace: 5V | SCLK | GND | MOSI
tNames: XTAL1
bNames: RST | XTAL2